# EAGLE board PulseSensor (EAGLE 9.3.0)
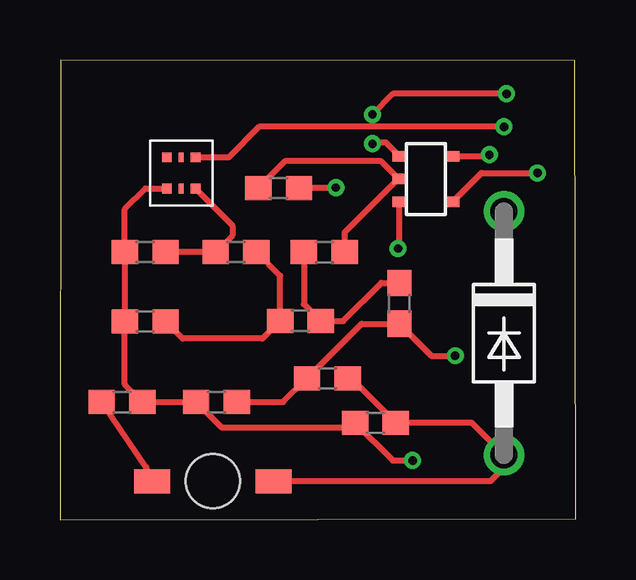
[diagram p0: board, top side]
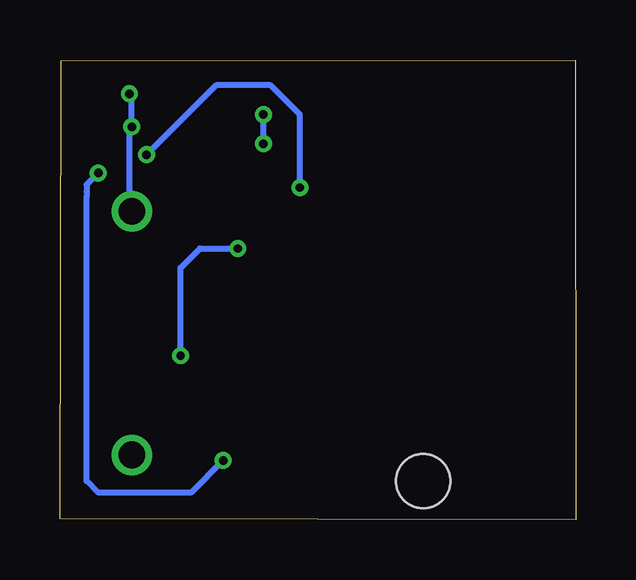
[diagram p1: board, bottom side, seen from below]

Size 21.51 x 19.17 mm. Coordinates in mm from the lower left corner, seen from the top.
Outline: 0,0 21.51,0.03 21.46,19.14 0.03,19.17 0,0
Copper layers (1*16): Top 0.0356mm / dielectric 1.5011mm / Bottom 0.0356mm
Design rules "ECE_Senior_Design": minimum track width 8mil, minimum drill 13mil, track to track 8mil, track to pad 8mil, pad to pad 6mil, via to via 8mil, smd to smd 6mil, copper to edge 15mil, drill to drill 8mil, minimum pad ring 7mil, minimum via ring 7mil, stop-mask expansion 3mil, vias tented up to drill 0mil, thermal gap 10mil

## Footprints (pad centres in the part's own frame; a part is rotated, then mirrored left to right if it is on the bottom)
0603 = smd 1.1 x 1: 1 -0.85,0; 2 0.85,0
DO41-10 = drill 1.118: A 5.08,0; C -5.08,0
ADPS_FP = smd 0.4 x 0.4: P$1 0.6,0.65; P$3 -0.6,0.65; P$4 -0.6,-0.65; P$6 0.6,-0.65 | smd 0.2 x 0.4: P$2 0,0.65; P$5 0,-0.65
REVMNT_LED_FP = smd 1.5 x 1: P$1 2.525,0; P$2 -2.525,0 | hole 2.25: 0,0
SOT-23-5 = smd 0.584 x 0.432: P$1 -1.105,0.953; P$2 -1.105,0.013; P$3 -1.105,-0.953; P$4 1.105,-0.953; P$5 1.105,0.953

## Placement (x,y rotation side)
C1  4.7uF  [0603]  3.56,8.26 0 top
C2  4.7uF  [0603]  7.34,11.15 0 top
C3  4.7uF  [0603]  10.03,8.28 0 top
C4  2.2uF  [0603]  14.15,9.02 270 top
C5  2.2uF  [0603]  13.16,4.04 180 top
D1  1N4004  [DO41-10]  18.52,7.77 270 top
R1  470  [0603]  2.59,4.9 180 top
R2  12k  [0603]  3.56,11.15 0 top
R3  100k  [0603]  6.53,4.9 180 top
R4  100k  [0603]  11.15,5.89 180 top
R5  10k  [0603]  11.02,11.15 180 top
R6  3.3M  [0603]  9.12,13.82 0 top
U$1  ADPS_9008_020  [ADPS_FP]  5.05,14.45 0 top
U$2  KB_REVMNT_LED  [REVMNT_LED_FP]  6.38,1.6 0 top
U$3  MCP6001-X_SOT-23-5  [SOT-23-5]  15.27,14.2 0 top

## Library data of the parts
C1-C3 = SparkFun-Capacitors; PROD_ID: CAP-08280
C4 C5 = SparkFun-Capacitors; PROD_ID: CAP-07888
D1 = diode
R1-R6 = SparkFun-Resistors
U$1-U$3 = HMD_Library

## Nets
3.3V: C5.1 D1.A R4.1 U$2.P$1
GND: C1.1 C5.2 R1.1 R2.1 R3.2 U$1.P$4 U$3.P$4
HR_OUT: R6.2 U$3.P$5
N$1: C2.1 R2.2 U$1.P$6
N$2: C1.2 C2.2 C3.1
N$3: C3.2 C4.1 R5.2
N$4: C4.2 R3.1 R4.2 U$3.P$3
N$6: R1.2 U$2.P$2
N$12: R5.1 R6.1 U$3.P$2
N$13: D1.C U$1.P$1 U$3.P$1

## Tracks (layer width: path | path; a pad name or v marks a point on that pad's centre or on a via)
3.3V
  Top 0.254: R4.1 12.15,5.89 C5.1 17.17,4.04 D1.A 18.52,2.16 17.96,1.6 U$2.P$1
GND  (via drill 0.35)
  Top 0.254: U$1.P$4 3.57,13.8 2.71,12.94 R2.1 C1.1 2.71,5.64 R1.1 R3.2 6.75,3.83 12.1,3.83 C5.2 13.88,2.46 v14.71,2.46 | U$3.P$4 17.58,14.45 v19.91,14.45
  Bottom 0.254: v19.91,14.45 20.4,13.96 20.4,13.66 20.4,13.46 20.4,1.6 19.91,1.12 16.05,1.12 v14.71,2.46
HR_OUT  (via drill 0.35)
  Top 0.254: R6.2 9.99,13.84 v11.51,13.84 | U$3.P$5 17.84,15.15 v17.91,15.21
  Bottom 0.254: v11.51,13.84 11.51,16.89 12.72,18.11 15.01,18.11 v17.91,15.21
N$1
  Top 0.254: R2.2 C2.1 7.19,11.85 7.19,12.27 U$1.P$6
N$2
  Top 0.254: C1.2 5.12,7.54 8.45,7.54 C3.1 9.18,10.16 C2.2
N$3
  Top 0.254: R5.2 10.17,8.99 C3.2 11.81,8.28 13.4,9.87 C4.1
N$4  (via drill 0.35)
  Top 0.254: R3.1 9.31,4.9 R4.2 12.57,8.17 C4.2 15.48,6.83 v16.48,6.83 | v14.1,11.3 14.16,11.37 U$3.P$3
  Bottom 0.254: v16.48,6.83 16.48,10.49 15.67,11.3 v14.1,11.3
N$6
  Top 0.254: U$2.P$2 3.6,2.18 R1.2
N$12
  Top 0.254: R6.1 9.41,14.96 13.36,14.96 14.11,14.21 | 14.11,14.21 U$3.P$2 | 14.11,14.21 11.87,11.97 R5.1
N$13  (via drill 0.35)
  Top 0.254: v18.52,16.38 8.31,16.38 7.03,15.1 U$1.P$1 | U$3.P$1 13.59,15.72 13.08,15.72 v13.03,15.67 | v18.62,17.75 13.89,17.75 v13.03,16.89
  Bottom 0.254: D1.C 18.62,12.95 18.62,16.28 v18.52,16.38 18.52,17.65 v18.62,17.75 | v13.03,15.67 v13.03,16.89